# EAGLE board pic_board_with_lcd (EAGLE 6.1)
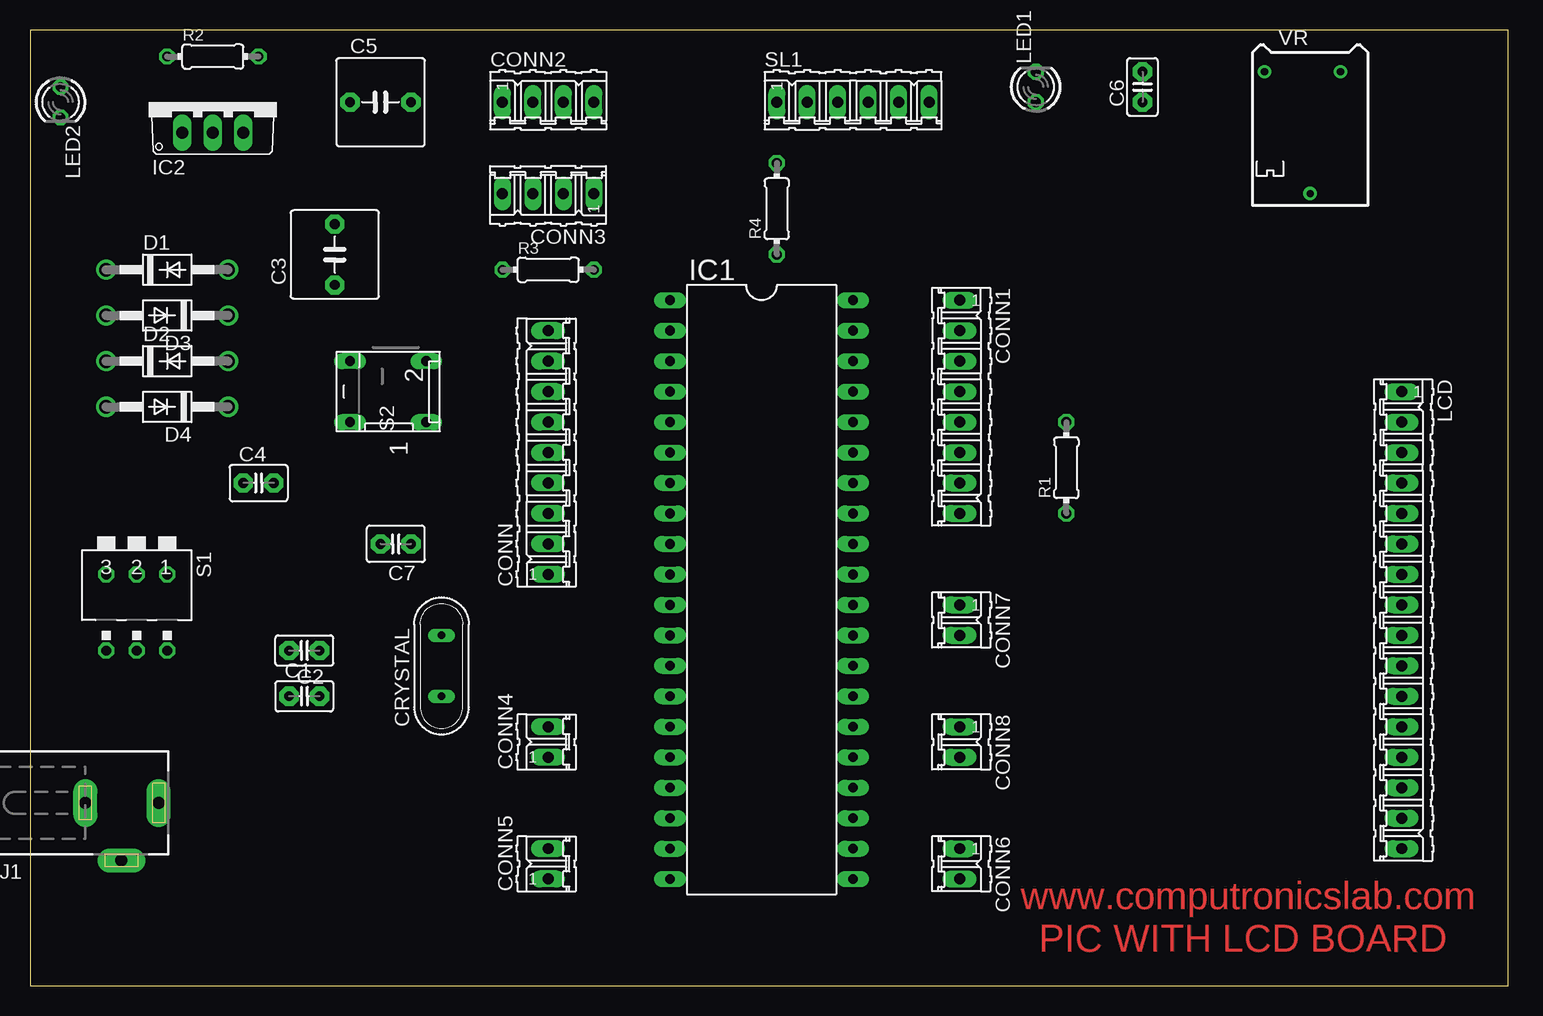
[diagram p0: board, top side]
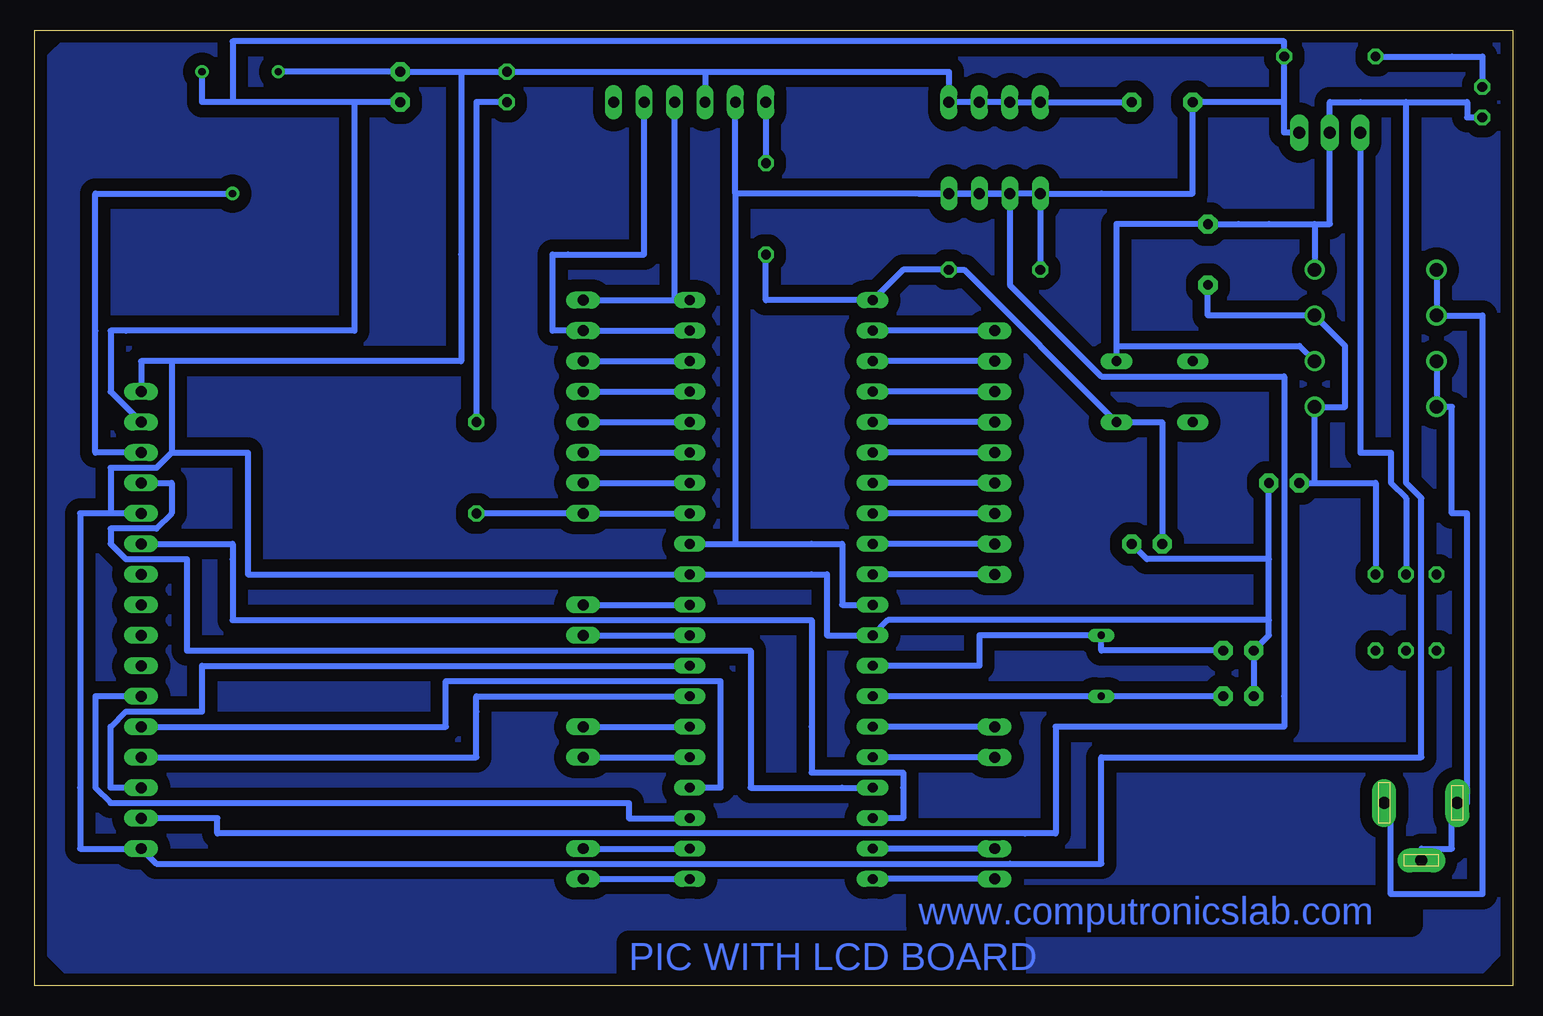
[diagram p1: board, bottom side, seen from below]

Size 123.17 x 79.68 mm. Coordinates in mm from the lower left corner, seen from the top.
Outline: 0,0 123.17,0 123.17,79.68 0,79.68 0,0
Copper layers (1*16): Top 0.035mm / dielectric 1.5mm / Bottom 0.035mm
Design rules: minimum track width 20mil, minimum drill 24mil, track to track 8mil, track to pad 8mil, pad to pad 8mil, via to via 8mil, smd to smd 8mil, copper to edge 40mil, drill to drill 8mil, minimum pad ring 10mil, minimum via ring 8mil, stop-mask expansion 4mil, vias tented up to drill 0mil, thermal gap 10mil

## Footprints (pad centres in the part's own frame; a part is rotated, then mirrored left to right if it is on the bottom)
C2.5-2 = drill 0.813 pad 1.6 octagon: 1 -1.27,0; 2 1.27,0
C5B7.2 = drill 0.813 pad 1.6 octagon: 1 -2.54,0; 2 2.54,0
C2.5-3 = drill 0.813 pad 1.6 octagon: 1 -1.27,0; 2 1.27,0
09P = drill 0.914 long: 1 -10.16,0; 2 -7.62,0; 3 -5.08,0; 4 -2.54,0; 5 0,0; 6 2.54,0; 7 5.08,0; 8 7.62,0; 9 10.16,0
08P = drill 0.914 long: 1 -8.89,0; 2 -6.35,0; 3 -3.81,0; 4 -1.27,0; 5 1.27,0; 6 3.81,0; 7 6.35,0; 8 8.89,0
04P = drill 0.914 long: 1 -3.81,0; 2 -1.27,0; 3 1.27,0; 4 3.81,0
02P = drill 0.914 long: 1 -1.27,0; 2 1.27,0
QS = drill 0.61 long: 1 -2.54,0; 2 2.54,0
DO41-10 = drill 1.118: A 5.08,0; C -5.08,0
DIL40 = drill 0.813 long: 1 -24.13,-7.62; 2 -21.59,-7.62; 3 -19.05,-7.62; 4 -16.51,-7.62; 5 -13.97,-7.62; 6 -11.43,-7.62; 7 -8.89,-7.62; 8 -6.35,-7.62; 9 -3.81,-7.62; 10 -1.27,-7.62; 11 1.27,-7.62; 12 3.81,-7.62; 13 6.35,-7.62; 14 8.89,-7.62; 15 11.43,-7.62; 16 13.97,-7.62; 17 16.51,-7.62; 18 19.05,-7.62; 19 21.59,-7.62; 20 24.13,-7.62; 21 24.13,7.62; 22 21.59,7.62; 23 19.05,7.62; 24 16.51,7.62; 25 13.97,7.62; 26 11.43,7.62; 27 8.89,7.62; 28 6.35,7.62; 29 3.81,7.62; 30 1.27,7.62; 31 -1.27,7.62; 32 -3.81,7.62; 33 -6.35,7.62; 34 -8.89,7.62; 35 -11.43,7.62; 36 -13.97,7.62; 37 -16.51,7.62; 38 -19.05,7.62; 39 -21.59,7.62; 40 -24.13,7.62
TO220V = drill 1.016 long: 1 -2.54,-2.54; 2 0,-2.54; 3 2.54,-2.54
DCJ0303 = drill 1 pad 2 long: 1 0,3.1; 2 4.8,0; 3 0,-3
16P = drill 0.914 long: 1 -19.05,0; 2 -16.51,0; 3 -13.97,0; 4 -11.43,0; 5 -8.89,0; 6 -6.35,0; 7 -3.81,0; 8 -1.27,0; 9 1.27,0; 10 3.81,0; 11 6.35,0; 12 8.89,0; 13 11.43,0; 14 13.97,0; 15 16.51,0; 16 19.05,0
LED3MM = drill 0.813 octagon: A -1.27,0; K 1.27,0
0204/7 = drill 0.813 octagon: 1 -3.81,0; 2 3.81,0
DA-03 = drill 0.813 octagon: 1 -2.54,-5.08; 2 0,-5.08; 3 2.54,-5.08; 4 2.54,1.27; 5 0,1.27; 6 -2.54,1.27
DP-02 = drill 0.813 long: 1 -2.54,-2.54; 2 2.54,-2.54; 3 2.54,3.81; 4 -2.54,3.81
06P = drill 0.914 long: 1 -6.35,0; 2 -3.81,0; 3 -1.27,0; 4 1.27,0; 5 3.81,0; 6 6.35,0
RTRIM64P = drill 0.61: 1 -2.54,-3.81; 2 7.62,0; 3 -2.54,2.54

## Placement (x,y rotation side)
C1  22pf  [C2.5-2]  22.86,24.13 0 top
C2  22pf  [C2.5-2]  22.86,27.94 180 top
C3  100uf  [C5B7.2]  25.4,60.96 90 top
C4  0.1uf  [C2.5-3]  19.05,41.91 0 top
C5  4.7uf  [C5B7.2]  29.21,73.66 0 top
C6  22pf  [C2.5-2]  92.71,74.93 90 top
C7  0.1uf  [C2.5-3]  30.48,36.83 180 top
CONN  9 pin  [09P]  43.18,44.45 90 top
CONN1  7 pin  [08P]  77.47,48.26 270 top
CONN2  4 pin  [04P]  43.18,73.66 0 top
CONN3  4 pin  [04P]  43.18,66.04 180 top
CONN4  [02P]  43.18,20.32 90 top
CONN5  2pin  [02P]  43.18,10.16 90 top
CONN6  2pin  [02P]  77.47,10.16 270 top
CONN7  2pin  [02P]  77.47,30.48 270 top
CONN8  2pin  [02P]  77.47,20.32 270 top
CRYSTAL  8MHZ  [QS]  34.29,26.67 90 top
D1  1N4007  [DO41-10]  11.43,59.69 0 top
D2  1N4007  [DO41-10]  11.43,52.07 0 top
D3  1N4007  [DO41-10]  11.43,55.88 180 top
D4  1N4007  [DO41-10]  11.43,48.26 180 top
IC1  PIC16f877a  [DIL40]  60.96,33.02 270 top
IC2  7805TV  [TO220V]  15.24,73.66 0 top
J1  [DCJ0303]  7.62,15.24 270 top
LCD  [16P]  114.3,30.48 270 top
LED1  3mm  [LED3MM]  83.82,74.93 90 top
LED2  3mm  [LED3MM]  2.54,73.66 270 top
R1  220E  [0204/7]  86.36,43.18 90 top
R2  220E  [0204/7]  15.24,77.47 0 top
R3  10K  [0204/7]  43.18,59.69 0 top
R4  68E  [0204/7]  62.23,64.77 90 top
S1  [DA-03]  8.89,29.21 180 top
S2  push switch  [DP-02]  30.48,49.53 90 top
SL1  [06P]  68.58,73.66 0 top
VR  10k  [RTRIM64P]  106.68,73.66 270 top

## Library data of the parts
C1-C7 = capacitor-wima
CONN CONN1-CONN8 LCD SL1 = con-amp-quick; OC_FARNELL: unknown; OC_NEWARK: unknown
CRYSTAL = special
D1-D4 = diode
IC1 = microchip; MF: MICROCHIP; MPN: PIC18F4455-I/P; OC_FARNELL: 9321314; OC_NEWARK: 05K2028
IC2 = linear
J1 = con-jack; OC_FARNELL: unknown; OC_NEWARK: unknown
LED1 LED2 = led
R1-R4 = rcl
S1 = switch-dil; MPN: MCDA03; OC_FARNELL: 1521999; OC_NEWARK: 74M2972
S2 = switch-dil; MPN: MCDP02; OC_FARNELL: 1255233; OC_NEWARK: 26M1095
VR = resistor

## Nets
N$1: C2.1 CRYSTAL.2 IC1.13
N$2: C1.2 CRYSTAL.1 IC1.14
N$3: LED1.A R1.2
N$4: CONN.1 IC1.10
N$5: CONN.2 IC1.9
N$6: CONN.3 IC1.8
N$7: CONN.4 IC1.7
N$8: CONN.5 IC1.6
N$9: CONN.6 IC1.5
N$10: CONN.7 IC1.4
N$11: CONN.8 IC1.3
N$12: CONN.9 IC1.2
N$13: CONN5.1 IC1.20
N$14: CONN5.2 IC1.19
N$15: CONN4.1 IC1.16
N$16: CONN4.2 IC1.15
N$17: IC1.17 LCD.4
N$18: CONN6.1 IC1.22
N$19: CONN1.1 IC1.40 SL1.4
N$20: CONN1.2 IC1.39 SL1.5
N$21: CONN1.3 IC1.38
N$22: CONN1.4 IC1.37
N$23: CONN1.5 IC1.36
N$24: CONN1.6 IC1.35
N$25: CONN1.7 IC1.34
N$26: CONN6.2 IC1.21
N$27: CONN7.1 IC1.30
N$28: CONN7.2 IC1.29
N$29: CONN1.8 IC1.33 R1.1
N$30: C3.1 C4.1 D3.C D4.C S1.1
N$31: D2.C D4.A J1.2 J1.3
N$32: D1.C D3.A J1.1
N$33: C5.1 C6.1 CONN3.1 CONN3.2 CONN3.3 CONN3.4 IC1.11 IC1.32 IC2.3 LCD.2 LCD.15 R2.2 R3.1 SL1.2 VR.3
N$34: LED2.A R2.1
N$35: C1.1 C2.2 C3.2 C4.2 C5.2 C6.2 C7.1 CONN2.1 CONN2.2 CONN2.3 CONN2.4 D1.A D2.A IC1.12 IC1.31 IC2.2 LCD.1 LCD.5 LCD.16 LED1.K LED2.K S2.2 SL1.3 VR.1
N$36: CONN8.2 IC1.25
N$38: IC1.23 LCD.11
N$39: C7.2 IC1.1 R3.2 R4.1 S2.1
N$40: LCD.3 VR.2
N$41: IC1.24 LCD.12
N$42: IC1.27 LCD.13
N$43: IC1.28 LCD.14
N$44: IC2.1 S1.2
N$45: R4.2 SL1.1
N$46: IC1.18 LCD.6
N$48: CONN8.1 IC1.26

## Tracks (layer width: path | path; a pad name or v marks a point on that pad's centre or on a via)
N$1
  Bottom 0.508: C2.1 34.29,27.94 CRYSTAL.2 44.45,29.21 44.45,26.67 IC1.13
N$2
  Bottom 0.508: C1.2 CRYSTAL.1 IC1.14
N$3
  Bottom 0.508: R1.2 86.36,73.66 LED1.A
N$4
  Bottom 0.508: CONN.1 IC1.10
N$5
  Bottom 0.508: CONN.2 IC1.9
N$6
  Bottom 0.508: CONN.3 IC1.8
N$7
  Bottom 0.508: CONN.4 IC1.7
N$8
  Bottom 0.508: CONN.5 IC1.6
N$9
  Bottom 0.508: CONN.6 IC1.5
N$10
  Bottom 0.508: CONN.7 IC1.4
N$11
  Bottom 0.508: CONN.8 IC1.3
N$12
  Bottom 0.508: CONN.9 IC1.2
N$13
  Bottom 0.508: CONN5.1 IC1.20
N$14
  Bottom 0.508: CONN5.2 IC1.19
N$15
  Bottom 0.508: CONN4.1 IC1.16
N$16
  Bottom 0.508: CONN4.2 IC1.15
N$17
  Bottom 0.508: IC1.17 55.88,16.51 63.5,16.51 63.5,27.94 67.31,27.94 105.41,27.94 110.49,27.94 110.49,30.48 110.49,35.56 113.03,35.56 115.57,35.56 116.84,36.83 116.84,38.1 113.03,38.1 111.76,39.37 111.76,41.91 LCD.4
N$18
  Bottom 0.508: CONN6.1 IC1.22
N$19
  Bottom 0.508: CONN1.1 69.85,57.15 | 69.85,57.15 IC1.40 69.85,57.15 | 69.85,57.15 SL1.4
N$20
  Bottom 0.508: IC1.39 CONN1.2 80.01,54.61 80.01,57.15 80.01,58.42 80.01,60.96 78.74,60.96 72.39,60.96 SL1.5
N$21
  Bottom 0.508: CONN1.3 IC1.38
N$22
  Bottom 0.508: CONN1.4 IC1.37
N$23
  Bottom 0.508: CONN1.5 IC1.36
N$24
  Bottom 0.508: CONN1.6 IC1.35
N$25
  Bottom 0.508: CONN1.7 IC1.34
N$26
  Bottom 0.508: CONN6.2 IC1.21
N$27
  Bottom 0.508: CONN7.1 IC1.30
N$28
  Bottom 0.508: CONN7.2 IC1.29
N$29
  Bottom 0.508: IC1.33 CONN1.8 R1.1
N$30
  Bottom 0.508: C3.1 25.4,55.88 22.86,55.88 D3.C 13.97,53.34 13.97,48.26 D4.C 16.51,41.91 | S1.1 11.43,41.91 16.51,41.91 | C4.1 16.51,41.91
N$31
  Bottom 0.508: D2.C D4.A 5.08,48.26 5.08,39.37 3.81,39.37 3.81,19.05 3.81,15.24 5.08,15.24 | 5.08,15.24 5.08,11.43 7.62,11.43 J1.2 | 5.08,15.24 J1.3 5.08,15.24
N$32
  Bottom 0.508: D1.C D3.A 2.54,55.88 2.54,11.43 2.54,7.62 5.08,7.62 10.16,7.62 10.16,15.24 J1.1
N$33
  Bottom 0.508: 106.68,73.66 109.22,73.66 VR.3 | C6.1 96.52,73.66 | 96.52,73.66 106.68,73.66 | LCD.2 116.84,49.53 116.84,54.61 115.57,54.61 96.52,54.61 96.52,59.69 96.52,73.66 | IC1.11 55.88,31.75 55.88,36.83 58.42,36.83 64.77,36.83 | IC1.32 64.77,36.83 | 19.05,73.66 19.05,71.12 IC2.3 | 19.05,73.66 R2.2 19.05,78.74 106.68,78.74 106.68,73.66 | 19.05,73.66 C5.1 26.67,68.58 26.67,66.04 34.29,66.04 CONN3.4 | CONN3.4 R3.1 | CONN3.4 CONN3.3 | CONN3.3 CONN3.2 CONN3.1 49.53,66.04 | 64.77,66.04 SL1.2 | 49.53,66.04 64.77,66.04 | LCD.15 107.95,13.97 107.95,12.7 40.64,12.7 38.1,12.7 38.1,21.59 29.21,21.59 19.05,21.59 19.05,24.13 19.05,50.8 34.29,50.8 41.91,58.42 CONN3.3 | 49.53,66.04 CONN3.3 | 64.77,66.04 64.77,36.83
N$34
  Bottom 0.508: LED2.A 2.54,77.47 5.08,77.47 R2.1
N$35
  Bottom 0.508: C1.1 C2.2 20.32,29.21 20.32,30.48 | 20.32,30.48 20.32,35.56 | 20.32,35.56 C4.2 | C7.1 30.48,35.56 20.32,35.56 | 20.32,30.48 52.07,30.48 IC1.12 57.15,29.21 57.15,34.29 58.42,34.29 IC1.31 105.41,34.29 105.41,38.1 105.41,44.45 111.76,44.45 | LED2.K 3.81,72.39 3.81,73.66 8.89,73.66 | 8.89,73.66 12.7,73.66 15.24,73.66 IC2.2 15.24,63.5 22.86,63.5 | 33.02,53.34 33.02,63.5 C3.2 22.86,63.5 | 33.02,53.34 S2.2 | D2.A 17.78,53.34 33.02,53.34 | D1.A 16.51,63.5 20.32,63.5 22.86,63.5 | LCD.5 116.84,39.37 | 116.84,39.37 119.38,39.37 119.38,16.51 119.38,11.43 LCD.16 113.03,10.16 41.91,10.16 34.29,10.16 34.29,19.05 7.62,19.05 7.62,40.64 8.89,41.91 8.89,73.66 | C5.2 CONN2.1 CONN2.2 CONN2.3 CONN2.4 46.99,74.93 46.99,76.2 49.53,76.2 69.85,76.2 | VR.1 C6.2 87.63,76.2 | 87.63,76.2 LED1.K 69.85,76.2 | 69.85,76.2 67.31,76.2 67.31,74.93 SL1.3 | 87.63,76.2 87.63,60.96 87.63,52.07 111.76,52.07 | 111.76,52.07 114.3,52.07 LCD.1 | 116.84,39.37 116.84,43.18 113.03,43.18 111.76,44.45 | 111.76,52.07 111.76,44.45
N$36
  Bottom 0.508: CONN8.2 IC1.25
N$37
  pour Bottom (isolate 1.016): 5.08,0 3.81,0 0,3.81 0,77.47 2.54,80.01 119.38,80.01 123.19,76.2 123.19,3.81 119.38,0
N$38
  Bottom 0.508: IC1.23 73.66,13.97 73.66,15.24 116.84,15.24 118.11,16.51 118.11,24.13 LCD.11
N$39
  Bottom 0.508: R4.1 62.23,57.15 IC1.1 50.8,59.69 R3.2 45.72,59.69 S2.1 29.21,46.99 C7.2
N$40
  Bottom 0.508: VR.2 118.11,66.04 118.11,54.61 118.11,44.45 LCD.3
N$41
  Bottom 0.508: IC1.24 66.04,16.51 66.04,19.05 66.04,25.4 88.9,25.4 88.9,21.59 113.03,21.59 LCD.12
N$42
  Bottom 0.508: IC1.27 86.36,24.13 86.36,22.86 86.36,19.05 LCD.13
N$43
  Bottom 0.508: IC1.28 109.22,26.67 109.22,22.86 113.03,22.86 115.57,22.86 116.84,21.59 116.84,16.51 LCD.14
N$44
  Bottom 0.508: S1.2 8.89,40.64 10.16,41.91 10.16,44.45 12.7,44.45 IC2.1
N$45
  Bottom 0.508: SL1.1 R4.2
N$46
  Bottom 0.508: IC1.18 50.8,13.97 50.8,16.51 50.8,17.78 54.61,17.78 58.42,17.78 58.42,21.59 58.42,30.48 67.31,30.48 106.68,30.48 106.68,35.56 106.68,36.83 113.03,36.83 LCD.6
N$48
  Bottom 0.508: CONN8.1 IC1.26

## Text on the board
Top: www.computronicslab.com | PIC WITH LCD BOARD
Bottom: www.computronicslab.com | PIC WITH LCD BOARD